# Altium PCB Sensors.PcbDoc
Units mil, origin at the board's own origin, x right, y up, seen from the top; angles counter-clockwise.
Board outline 1625 x 1755 mil, 2 copper layers (Top Layer, Bottom Layer); 50 components, 34 nets, 167 pads, 122 vias.
Unrouted connection lines stored in the file: 40.
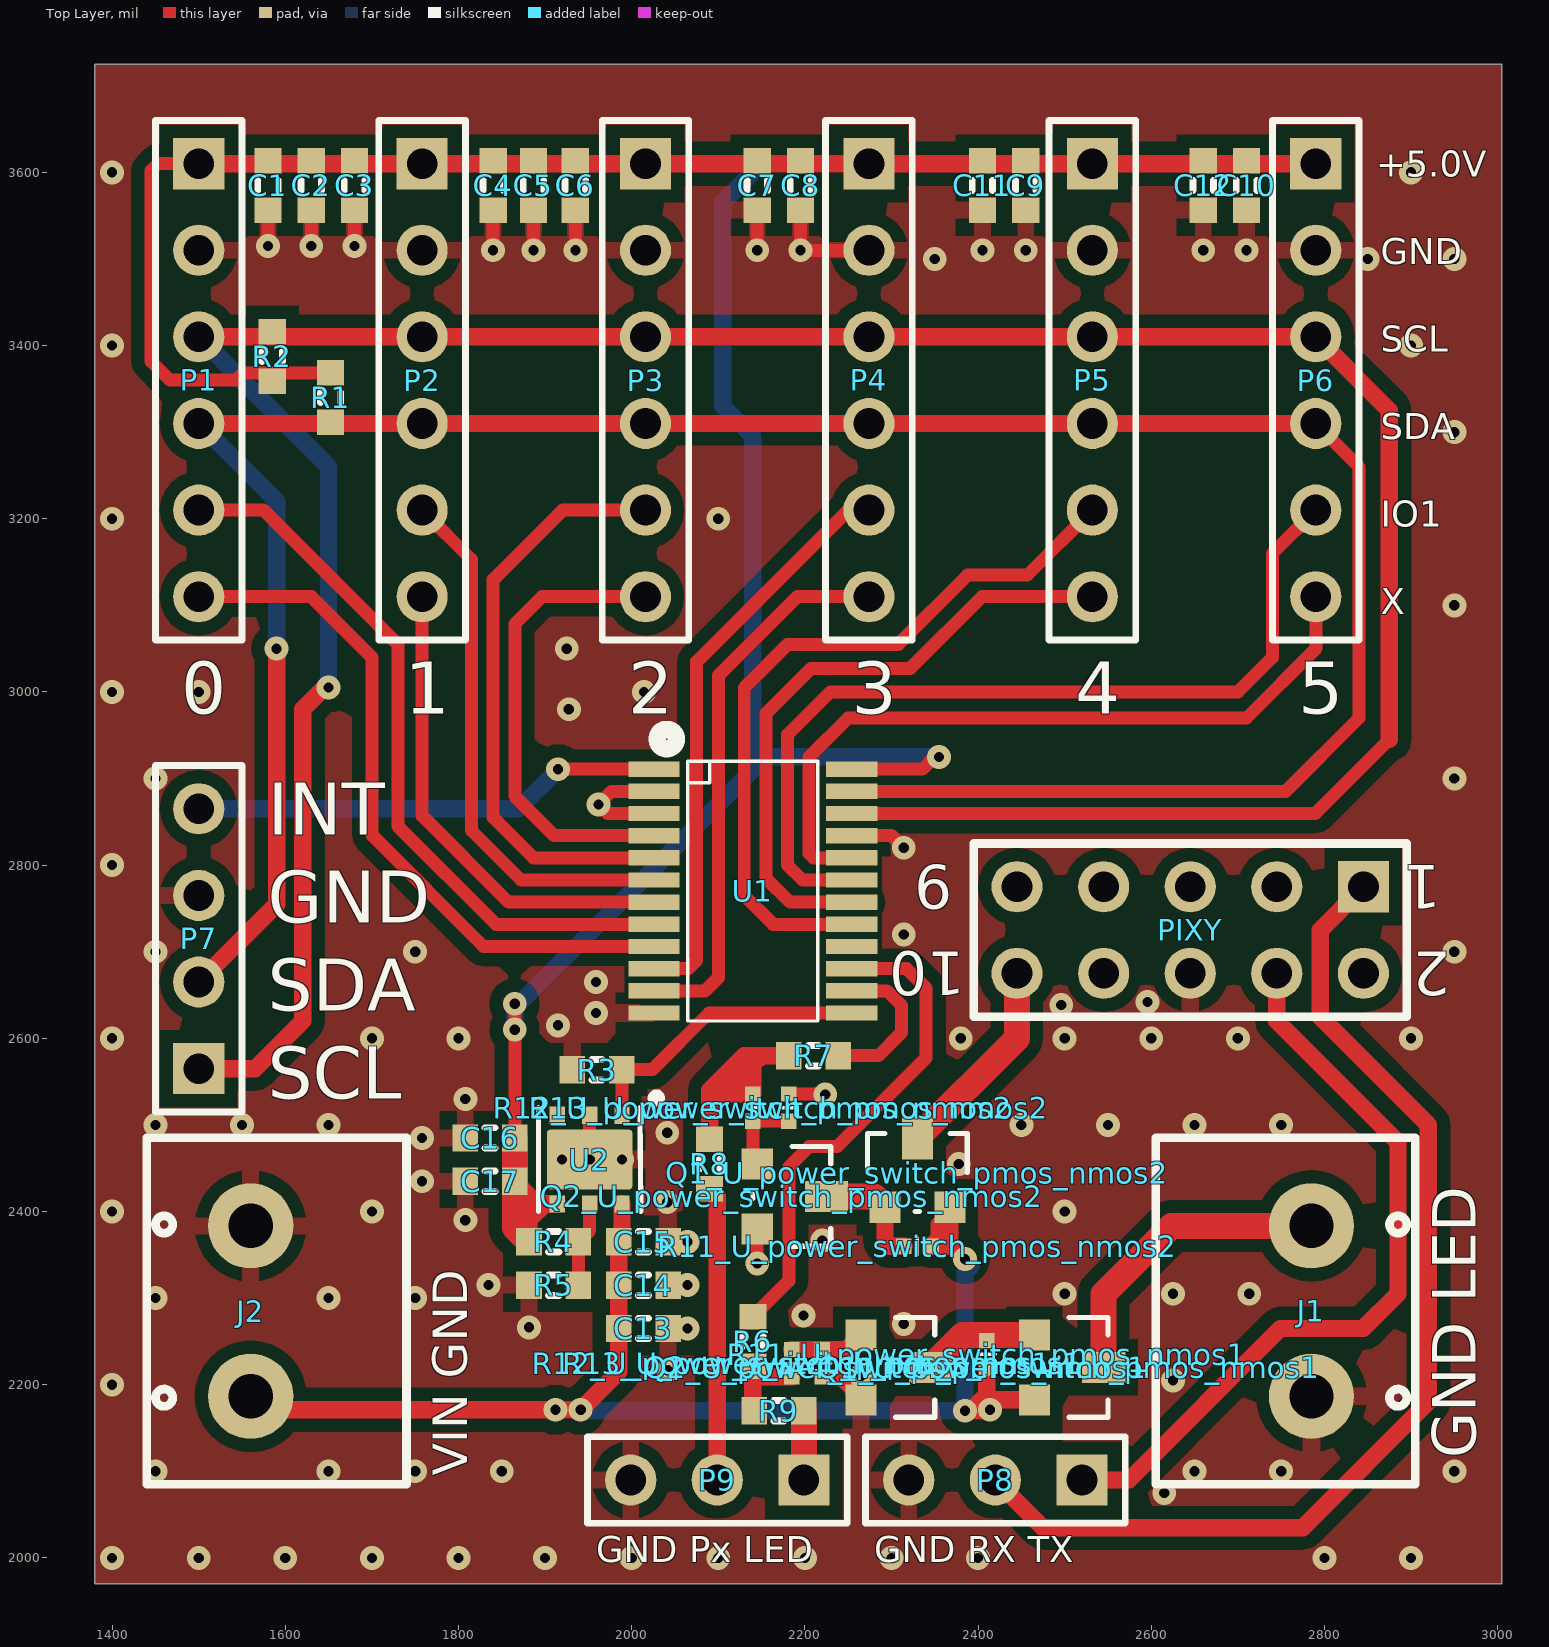
[diagram p0: Top Layer view]
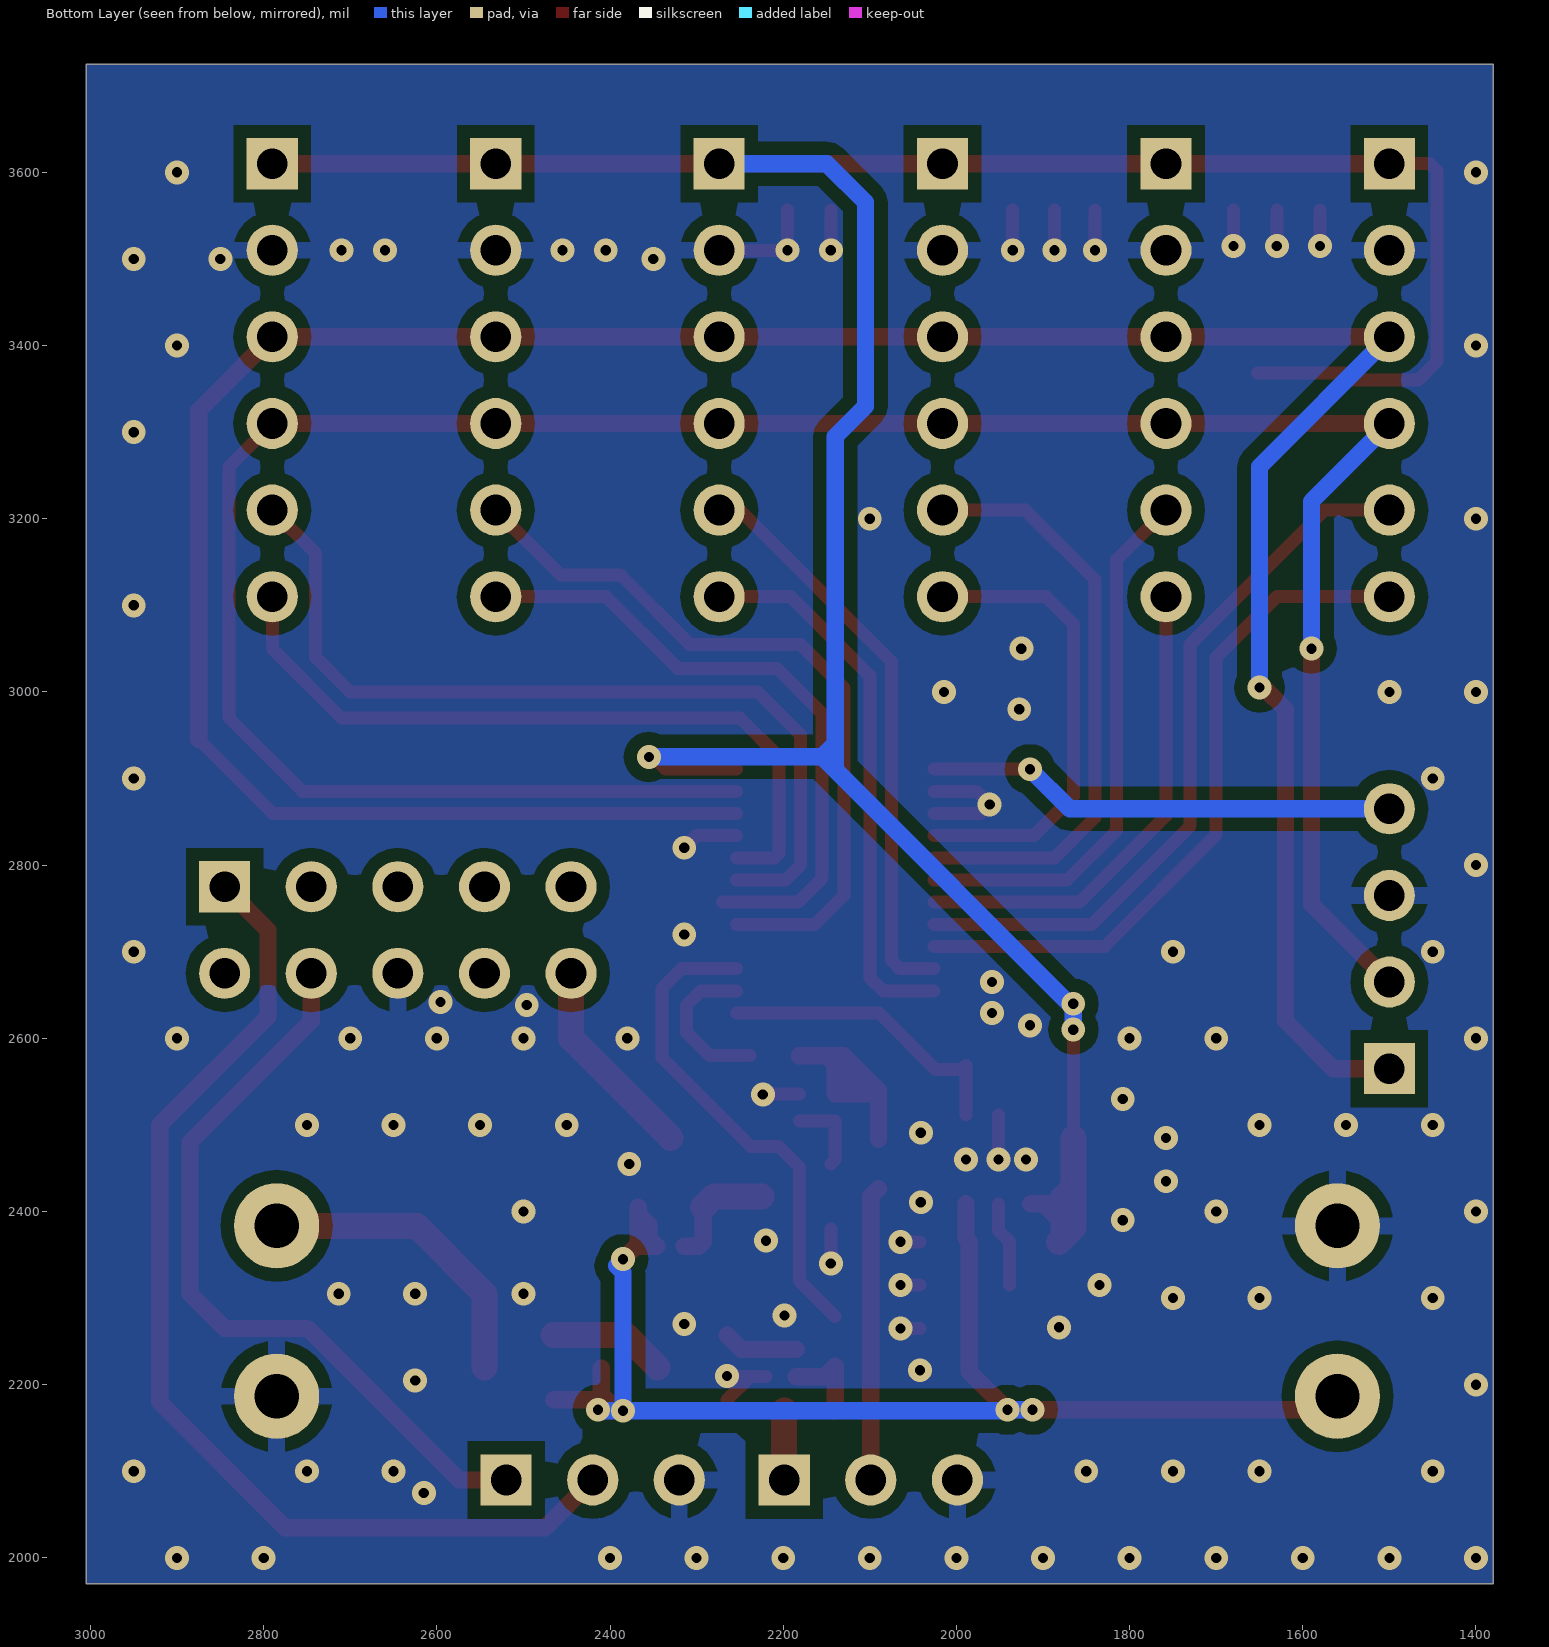
[diagram p1: Bottom Layer view, seen from below]

## Layer stack, top to bottom
Top Solder: solder mask 0.4, Solder Resist, Dk 3.5
Top Layer: signal copper 1.4
Dielectric 1: dielectric 12.6, FR-4, Dk 4.8
Bottom Layer: signal copper 1.4
Bottom Solder: solder mask 0.4, Solder Resist, Dk 3.5

## Board outline
1380,1970 1380,3725 3005,3725 3005,1970

## Design rules (kind name [scope] priority, off if disabled: settings)
Clearance U2 [InComponent('U2') OR InComponent('U1')] p1: gap=5 ignorepadtopadclearanceinfootprint=FALSE
Clearance [All] p2: gap=10 ignorepadtopadclearanceinfootprint=FALSE except(15: Arc-Poly Track-Poly SMDPad-Poly THPad-Poly Via-Poly Fill-Poly Poly-Poly)
MinimumSolderMaskSliver [All] p1: minsoldermaskwidth=5
PlaneConnect [All] p1: planeconnectstyle=Direct reliefexpansion=20 reliefentries=4 reliefconductorwidth=10 reliefairgap=10
PlaneConnect via [IsVia] p2: planeconnectstyle=Direct reliefexpansion=20 reliefentries=4 reliefconductorwidth=10 reliefairgap=10
PolygonConnect via_p [IsVia] p1: connectstyle=Direct reliefconductorwidth=10 reliefentries=4 polygonreliefangle="90 Angle" airgapwidth=10
PolygonConnect via_1 [All] p2: connectstyle=Relief reliefconductorwidth=20 reliefentries=4 polygonreliefangle="90 Angle" airgapwidth=15
RoutingVias [All] p1: holewidth=28 width=50 viastyle="Through Hole" minholewidth=11.81 minwidth=27.56 maxholewidth=118.11 maxwidth=196.85
SilkToSolderMaskClearance [IsPad] p1: minsilkscreentomaskgap=3 clearancetoexposedcopper=TRUE
SolderMaskExpansion [All] p1: expansion=4
Width [All] p1: maxlimit=50 minlimit=10 preferedwidth=10
27 further rules are at their usual default settings.

## Classes and differential pairs
channel class power_switch_pmos_nmos: U_power_switch_pmos_nmos1 U_power_switch_pmos_nmos2
component class U_power_switch_pmos_nmos2: Q1_U_power_switch_pmos_nmos2 Q2_U_power_switch_pmos_nmos2 R11_U_power_switch_pmos_nmos2 R12_U_power_switch_pmos_nmos2 R13_U_power_switch_pmos_nmos2
component class U_power_switch_pmos_nmos1: Q1_U_power_switch_pmos_nmos1 Q2_U_power_switch_pmos_nmos1 R11_U_power_switch_pmos_nmos1 R12_U_power_switch_pmos_nmos1 R13_U_power_switch_pmos_nmos1
component class Sensors: C1 C2 C3 C4 C5 C6 C7 C8 C9 C10 C11 C12 C13 C14 C15 C16 C17 J1 J2 P1 P2 P3 P4 P5 P6 P7 P8 P9 PIXY R1 R2 R3 R4 R5 R6 R7 R8 R9 U1 U2

## Components (designator, comment, footprint, x,y, rotation, side; value= is the part's Value field where it differs from the comment)
C1 "Ceramic X7R" C_0603_1608 1580,3585 r270 top value=1uF
C2 "Ceramic X7R" C_0603_1608 1630,3585 r270 top value=100nF
C3 "Ceramic X7R" C_0603_1608 1680,3585 r270 top value=1uF
C4 "Ceramic X7R" C_0603_1608 1840,3585 r270 top value=100nF
C5 "Ceramic X7R" C_0603_1608 1886.61,3585 r270 top value=1uF
C6 "Ceramic X7R" C_0603_1608 1935,3585 r270 top value=100nF
C7 "Ceramic X7R" C_0603_1608 2145,3585 r270 top value=1uF
C8 "Ceramic X7R" C_0603_1608 2195,3585 r270 top value=100nF
C9 "Ceramic X7R" C_0603_1608 2455,3585 r270 top value=100nF
C10 "Ceramic X7R" C_0603_1608 2710,3585 r270 top value=100nF
C11 "Ceramic X7R" C_0603_1608 2405,3585 r270 top value=1uF
C12 "Ceramic X7R" C_0603_1608 2660,3585 r270 top value=1uF
C13 "Ceramic X5R" C_0603_1608 2013.54,2265 r0 top value=10uF
C14 "Ceramic X5R" C_0603_1608 2013.54,2315 r0 top value=10uF
C15 "Ceramic X7R" C_0603_1608 2013.54,2365 r0 top value=100nF
C16 "Ceramic X5R" C_0603_1608 1836.46,2485 r180 top value=10uF
C17 "Ceramic X7R" C_0603_1608 1836.46,2435 r180 top value=100nF
J1 "ARK2" J_ARK2 2785,2285 r270 top value=DG301-5.0-02P-12-18A(H)
J2 "ARK2" J_ARK2 1560,2285 r90 top value=DG301-5.0-02P-12-18A(H)
P1 "Goldpin" P_HEADER_1x6_2.54 1500,3610 r270 top value=DS1021-1*6SF1-1
P2 "Goldpin" P_HEADER_1x6_2.54 1758,3610 r270 top value=DS1021-1*6SF1-1
P3 "Goldpin" P_HEADER_1x6_2.54 2016,3610 r270 top value=DS1021-1*6SF1-1
P4 "Goldpin" P_HEADER_1x6_2.54 2274,3610 r270 top value=DS1021-1*6SF1-1
P5 "Goldpin" P_HEADER_1x6_2.54 2532,3610 r270 top value=DS1021-1*6SF1-1
P6 "Goldpin" P_HEADER_1x6_2.54 2790,3610 r270 top value=DS1021-1*6SF1-1
P7 "Goldpin" P_HEADER_1x4_2.54 1500,2565 r90 top value=DS1021-1*4SF1-1
P8 "Goldpin" P_HEADER_1x3_2.54 2520,2090 r180 top value=DS1021-1*3SF1-1
P9 "Goldpin" P_HEADER_1x3_2.54 2198.86,2090 r180 top value=DS1021-1*3SF1-1
PIXY "Goldpin" P_HEADER_2x5_2.54 2845,2775 r180 top locked value=5-146253-5
Q1_U_power_switch_pmos_nmos1 "DMG2307L" SOT23_TO236_SC59 2505,2220 r270 top (schematic designator Q1)
Q1_U_power_switch_pmos_nmos2 "DMG2307L" SOT23_TO236_SC59 2330,2445 r0 top (schematic designator Q1)
Q2_U_power_switch_pmos_nmos1 "2N7002K-7" SOT23_TO236_SC59 2305,2220 r270 top (schematic designator Q2)
Q2_U_power_switch_pmos_nmos2 "2N7002K-7" SOT23_TO236_SC59 2185,2417.5 r270 top (schematic designator Q2)
R1 "Resistor" R_0603_1608 1652.33,3340 r90 top value=4.7k
R2 "Resistor" R_0603_1608 1585,3387.54 r270 top value=4.7k
R3 "Resistor" R_0603_1608 1960,2563.86 r0 top value=100k
R4 "Resistor" R_NC_0603_1608 1910,2365 r180 top value=NC
R5 "Resistor" R_NC_0603_1608 1910,2315 r0 top value=NC
R6 "Resistor" R_NC_0603_1608 2140,2250 r270 top value=NC
R7 "Resistor" R_NC_0603_1608 2210,2580 r180 top value=NC
R8 "Resistor" R_0603_1608 2090,2455 r90 top value=0R
R9 "Resistor" R_0603_1608 2170,2170 r180 top value=0R
R11_U_power_switch_pmos_nmos1 "Resistor" R_0402_1005 2410,2235 r90 top value=22k (schematic designator R11)
R11_U_power_switch_pmos_nmos2 "Resistor" R_0402_1005 2330,2360 r180 top value=22k (schematic designator R11)
R12_U_power_switch_pmos_nmos1 "Resistor" R_0402_1005 2185,2225 r90 top value=2.2k (schematic designator R12)
R12_U_power_switch_pmos_nmos2 "Resistor" R_0402_1005 2140,2520 r270 top value=2.2k (schematic designator R12)
R13_U_power_switch_pmos_nmos1 "Resistor" R_0402_1005 2220,2225 r90 top value=220k (schematic designator R13)
R13_U_power_switch_pmos_nmos2 "Resistor" R_0402_1005 2181.46,2520 r270 top value=220k (schematic designator R13)
U1 "5 Low-Voltage 16-Bit I2C and SMBus Low-Power I/O Expander with Interrupt Output and Configuration Registers" TSSOP24_8x8 2140,2770 r270 top locked value=TCA9535DBR
U2 "LD39050PUR" DFN6_3x3 1951.46,2460 r180 top

## Footprints (in the part's own frame and the unit in brackets; to place one, negate y for a bottom-side part, rotate by r counter-clockwise, add the part's x,y. Pads: shape width x height; smd on the part's side, far side on the other; paste and mask are expansions set on the pad)
C_0603_1608 [mm]
  rect 0.75x0.8 smd: 1(-0.725,0) 2(0.725,0)
  silkscreen extent -0.15,-0.3 0.15,0.3, body extent -0.85,-0.45 0.85,0.45, height 0.89
DFN6_3x3 [mm]
  rect 0.45x0.5 smd: 1(-0.95,-1.3) 2(0,-1.3) 3(0.95,-1.3) 4(0.95,1.3) 5(0,1.3) 6(-0.95,1.3)
  rrect10% 2.5x1.75 smd: EP1(0,0)
  silkscreen extent -2.08,-1.93 1.5,1.52, body extent -1.5,-1.55 1.5,1.55, height 0.75
J_ARK2 [mm]
  round 2.5 hole 1.3: 1(-2.5,0) 2(2.5,0)
  silkscreen extent -5.08,-4.57 5.08,3.05, body extent -5,-4.6 5.6,3, height 10.05
P_HEADER_1x3_2.54 [mm] "Connector; Header; 3 Position, Male"
  rect 1.5x1.5 hole 0.9: 1(0,0)
  round 1.5 hole 0.9: 2(2.54,0) 3(5.08,0)
  silkscreen extent -1.27,-1.27 6.35,1.27, body extent -1.17,-1.25 6.45,1.25, height 8.2
P_HEADER_1x4_2.54 [mm] "Connector; Header; 4 Position; Male"
  rect 1.5x1.5 hole 0.9: 1(0,0)
  round 1.5 hole 0.9: 2(2.54,0) 3(5.08,0) 4(7.62,0)
  silkscreen extent -1.27,-1.27 8.89,1.27, body extent -1.17,-1.25 8.99,1.25, height 8.2
P_HEADER_1x6_2.54 [mm] "Connector; Header; 6 Position, Male"
  rect 1.5x1.5 hole 0.9: 1(0,0)
  round 1.5 hole 0.9: 2(2.54,0) 3(5.08,0) 4(7.62,0) 5(10.16,0) 6(12.7,0)
  silkscreen extent -1.27,-1.27 13.97,1.27, body extent -1.17,-1.25 14.07,1.25, height 8.2
P_HEADER_2x5_2.54 [mm] "Connector; Header; 4x2 Position; Male"
  rect 1.5x1.5 hole 0.9: 1(0,0)
  round 1.5 hole 0.9: 2(0,2.54) 3(2.54,0) 4(2.54,2.54) 5(5.08,0) 6(5.08,2.54) 7(7.62,0) 8(7.62,2.54) 9(10.16,0) 10(10.16,2.54)
  silkscreen extent -1.27,-1.27 11.43,3.81, body extent -1.27,-1.24 11.43,3.79, height 8.54
R_0402_1005 [mm]
  rect 0.45x0.45 smd: 1(-0.4,0) 2(0.4,0)
  silkscreen extent 0,-0.25 0,0.25, body extent -0.52,-0.3 0.52,0.3, height 0.34
R_0603_1608 [mm]
  rect 0.75x0.8 smd: 1(-0.725,0) 2(0.725,0)
  silkscreen extent -0.15,-0.3 0.15,0.3, body extent -0.87,-0.47 0.88,0.48, height 0.54
R_NC_0603_1608 [mm]
  rect 0.75x0.8 smd: 1(-0.725,0) 2(0.725,0)
  silkscreen extent -0.15,-0.3 0.15,0.3, body extent -0.87,-0.47 0.88,0.48, height 0.54
SOT23_TO236_SC59 [mil]
  rect 36x36 smd: 1(-37.5,-40) 2(37.5,-40)
  rect 36x50 smd: 3(0,40)
  silkscreen extent -57,-45 58,45, body extent -57,-55 57,55, height 51
TSSOP24_8x8 [mm]
  rect 0.45x1.5 smd: 1(-3.575,-2.9) 2(-2.925,-2.9) 3(-2.275,-2.9) 4(-1.625,-2.9) 5(-0.975,-2.9) 6(-0.325,-2.9) 7(0.325,-2.9) 8(0.975,-2.9) 9(1.625,-2.9) 10(2.275,-2.9) 11(2.925,-2.9) 12(3.575,-2.9) 13(3.575,2.9) 14(2.925,2.9) 15(2.275,2.9) 16(1.625,2.9) 17(0.975,2.9) 18(0.325,2.9) 19(-0.325,2.9) 20(-0.975,2.9) 21(-1.625,2.9) 22(-2.275,2.9) 23(-2.925,2.9) 24(-3.575,2.9)
  silkscreen extent -4.74,-2.81 3.81,1.91, body extent -3.9,-3.2 3.99,3.2, height 1.15

## Part data
C1 C3 C5 C7 C11 C12: library part C_1uF_25V_X7R_0603_10, "Capacitor", Dielectric=X7R, Manufacturer=Samsung, Manufacturer Part Number=CL10B105KA8NNNC, Tolerance (%)=10, Voltage=25V, HelpURL=http://www.tme.eu/pl/Document/4a42202b32dab16128fe107dd69598cc/samsung-chip-cap.pdf, Part Number=C_1uF_25V_X7R_0603_10, SCH_Footprint=0603, Supplier 1=TME, Supplier 2="RS Components", Supplier 3=Farnell, Supplier 4=Mouser, Supplier 5=Digi-Key, Supplier Part Number 1=CL10B105KA8NNNC
C2 C4 C6 C8 C9 C10 C15 C17: library part C_100nF_50V_X7R_0603_5, "Capacitor", Dielectric=X7R, Manufacturer=Samsung, Manufacturer Part Number=CL10B104JB8NNNC, Tolerance (%)=5, Voltage=50V, HelpURL=http://www.tme.eu/pl/Document/4a42202b32dab16128fe107dd69598cc/samsung-chip-cap.pdf, Part Number=C_100nF_50V_X7R_0603_5, SCH_Footprint=0603, Supplier 1=TME, Supplier 2="RS Components", Supplier 3=Farnell, Supplier 4=Mouser, Supplier 5=Digi-Key, Supplier Part Number 1=CL10B104JB8NNNC
C13 C14 C16: library part C_10uF_16V_X5R_0603_20, "Capacitor", Dielectric=X5R, Manufacturer="Samsung Electro-Mechanics", Manufacturer Part Number=CL10A106MO8NQNC, Tolerance (%)=20, Voltage=16V, HelpURL=http://www.tme.eu/pl/Document/4a42202b32dab16128fe107dd69598cc/samsung-chip-cap.pdf, Part Number=C_10uF_16V_X5R_0603_20, SCH_Footprint=0603, Supplier 1=TME, Supplier 2="RS Components", Supplier 3=Farnell, Supplier 4=Mouser, Supplier 5=Digi-Key, Supplier Part Number 1=CL10A106MO8NQNC
J1 J2: library part J_TB-5.0-P-2P, "ARK Screw terminal, 2-Pin", Manufacturer="DEGSON ELECTRONICS", Manufacturer Part Number=DG301-5.0-02P-12-18A(H), Supplier Part Number 1=DG301-5.0-2/6B, Component Type=Standard, HelpURL=https://datasheet.octopart.com/DG301-5.0-03P-12-18A%28H%29-Degson-datasheet-17801202.pdf, Part Number=J_TB-5.0-P-2P, SCH_Footprint=ARK2, Supplier 1=TME, Supplier 2="RS Components", Supplier 3=Farnell, Supplier 4=Mouser, Supplier 5=Digi-Key
P1 P2 P3 P4 P5 P6: library part P_HEADER_1x6_2.54, "Header, 6-Pin", Manufacturer=Connfly, Manufacturer Part Number=DS1021-1*6SF1-1, Supplier Part Number 1=ZL201-06G, Component Type=Standard, HelpURL=http://www.tme.eu/en/Document/cc301e58a5da78cb543a94b5a5b7f06a/DS1021.pdf, Part Number=P_HEADER_1x6_2.54, SCH_Footprint="1x6 2.54mm", Supplier 1=TME, Supplier 2="RS Components", Supplier 3=Farnell, Supplier 4=Mouser, Supplier 5=Digi-Key
P7: library part P_HEADER_1x4_2.54, "Header, 4-Pin", Manufacturer=Connfly, Manufacturer Part Number=DS1021-1*4SF1-1, Supplier Part Number 1=ZL201-04G, Component Type=Standard, HelpURL=http://datasheet.octopart.com/DS1021-1%2A4SF1-1-Connfly-datasheet-65537859.pdf, Part Number=P_HEADER_1x4_2.54, SCH_Footprint="1x4 2.54mm", Supplier 1=TME, Supplier 2="RS Components", Supplier 3=Farnell, Supplier 4=Mouser, Supplier 5=Digi-Key
P8 P9: library part P_HEADER_1x3_2.54, "Header, 3-Pin", Manufacturer=Connfly, Manufacturer Part Number=DS1021-1*3SF1-1, Supplier Part Number 1=ZL201-03G, Component Type=Standard, HelpURL=http://www.tme.eu/en/Document/cc301e58a5da78cb543a94b5a5b7f06a/DS1021.pdf, Part Number=P_HEADER_1x3_2.54, SCH_Footprint="1x3 2.54mm", Supplier 1=TME, Supplier 2="RS Components", Supplier 3=Farnell, Supplier 4=Mouser, Supplier 5=Digi-Key
PIXY: library part P_HEADER_2x5_2.54, "Header, 10-Pin, Dual row", Manufacturer="TE Connectivity", Manufacturer Part Number=5-146253-5, Component Type=Standard, HelpURL=https://sigma.octopart.com/11631052/technical_drawing/TE-Connectivity-5-146253-5.pdf, Part Number=P_HEADER_2x5_2.54, SCH_Footprint="2x5 2.54mm", Supplier 1=TME, Supplier 2="RS Components", Supplier 3=Farnell, Supplier 4=Mouser, Supplier 5=Digi-Key, Supplier Part Number 2=782-9205, Supplier Part Number 3=2311131, Supplier Part Number 4=571-5-146253-5, Supplier Part Number 5=A121461-ND
Q1_U_power_switch_pmos_nmos1 Q1_U_power_switch_pmos_nmos2: library part QP_DMG2307L, Current=3A, Manufacturer="Diodes Inc", Supplier Part Number 1=DMG2307L-7, Voltage=30, HelpURL=https://www.diodes.com/assets/Datasheets/DMG2307L.pdf, Manufacturer Part Number=DMG2307L, Part Number=QP_DMG2307L, SCH_Footprint=SOT23, Supplier 1=TME, Supplier 2="RS Components", Supplier 3=Farnell, Supplier 4=Mouser, Supplier 5=Digi-Key, Supplier Part Number 2=8222539, Supplier Part Number 3=3127316, Supplier Part Number 4=621-DMG2307L-7, Supplier Part Number 5=DMG2307L-7DICT-ND, Type=P-MOS
Q2_U_power_switch_pmos_nmos1 Q2_U_power_switch_pmos_nmos2: library part QN_2N7002K-7_60V_350mA, Current=0A8, Manufacturer="DIODES inc", Voltage=60V, HelpURL=http://datasheet.octopart.com/2N7002K-7-Diodes-Inc.-datasheet-12515815.pdf, Manufacturer Part Number=2N7002K-7, Part Number=QN_2N7002K-7_60V_350mA, SCH_Footprint=SOT23, Supplier 1=TME, Supplier 2="RS Components", Supplier 3=Farnell, Supplier 4=Mouser, Supplier 5=Digi-Key, Supplier Part Number 2=7703383, Supplier Part Number 3=1713825, Supplier Part Number 4=621-2N7002K-7, Supplier Part Number 5=2N7002K-7DICT-ND, Type=N-MOS
R1 R2: library part R_4.7k_0603_1, Manufacturer=Yageo, Manufacturer Part Number=RC0603FR-074K7L, Power=100mW, Supplier Part Number 1=RC0603FR-074K7, Tolerance=1%, Voltage=75V, HelpURL=http://www.farnell.com/datasheets/2167052.pdf?_ga=2.156163131.1690599162.1548417389-1379097396.1542296996&_gac=1.18389067.1547230258.Cj0KCQiAmuHhBRD0ARIsAFWyPwhX8HcvXnM3tA0ZBodZLzDIjH2ZxLpjT5LWo9bad_HPRbU8LfPq44UaAhEwEALw_wcB, Part Number=R_4.7k_0603_1, SCH_Footprint=0603, Supplier 1=TME, Supplier 2="RS Components", Supplier 3=Farnell, Supplier 4=Mouser, Supplier 5=Digi-Key, Supplier Part Number 3=9238565, Supplier Part Number 4=603-RC0603FR-074K7L, Supplier Part Number 5=311-4.70KHRCT-ND
R3: library part R_100k_0603_1, Manufacturer=Royalohm, Manufacturer Part Number=0603SAF1003T5E, Power=100mW, Supplier Part Number 1=SMD0603-100K-1%, Tolerance=1%, Voltage=50V, HelpURL=http://www.tme.eu/pl/Document/b315665a56acbc42df513c99b390ad98/ROYALOHM-THICKFILM.pdf, Part Number=R_100k_0603_1, SCH_Footprint=0603, Supplier 1=TME, Supplier 2="RS Components", Supplier 3=Farnell, Supplier 4=Mouser, Supplier 5=Digi-Key, Supplier Part Number 4=667-ERJ-3EKF1003V, Supplier Part Number 5=P100KHCT-ND
R4 R5 R6 R7: library part R_GENERIC_0603, Part Number=R_GENERIC_0603, SCH_Footprint=0603, Supplier 1=TME, Supplier 2="RS Components", Supplier 3=Farnell, Supplier 4=Mouser, Supplier 5=Digi-Key
R8 R9: library part R_0R_0603_5, Manufacturer=Samsung, Manufacturer Part Number=RC1608J000CS, Power=100mW, Tolerance=5%, Voltage=50V, HelpURL=http://www.samsungsem.com/kr/support/product-search/chip-resistor/RC1608J000CS.jsp, Part Number=R_0R_0603_5, SCH_Footprint=0603, Supplier 1=TME, Supplier 2="RS Components", Supplier 3=Farnell, Supplier 4=Mouser, Supplier 5=Digi-Key, Supplier Part Number 5=1276-3510-1-ND
R11_U_power_switch_pmos_nmos1 R11_U_power_switch_pmos_nmos2: library part R_22k_0402_1, Manufacturer=Panasonic, Manufacturer Part Number=ERA-2AEB223X, Power=63mW, Tolerance=1%, Voltage=50V, HelpURL=http://www.mouser.com/ds/2/315/AOA0000C237-1100991.pdf, Part Number=R_22k_0402_1, SCH_Footprint=0402, Supplier 1=TME, Supplier 2="RS Components", Supplier 3=Farnell, Supplier 4=Mouser, Supplier 5=Digi-Key, Supplier Part Number 2=566557, Supplier Part Number 3=1577719, Supplier Part Number 4=667-ERA-2AEB223X, Supplier Part Number 5=P22KDCCT-ND
R12_U_power_switch_pmos_nmos1 R12_U_power_switch_pmos_nmos2: library part R_2.2k_0402_1, Manufacturer=Panasonic, Manufacturer Part Number=ERJ-2RKF2201X, Power=100mW, Tolerance=1%, Voltage=50V, HelpURL=https://datasheet.octopart.com/ERJ-2RKF2201X-Panasonic-datasheet-13266541.pdf, Part Number=R_2.2k_0402_1, SCH_Footprint=0402, Supplier 1=TME, Supplier 2="RS Components", Supplier 3=Farnell, Supplier 4=Mouser, Supplier 5=Digi-Key, Supplier Part Number 2=7325384, Supplier Part Number 3=2397219, Supplier Part Number 4=ERJ-2RKF2201X, Supplier Part Number 5=P2.20KLCT-ND
R13_U_power_switch_pmos_nmos1 R13_U_power_switch_pmos_nmos2: library part R_220k_0402_1, Manufacturer=Vishay, Manufacturer Part Number=CRCW0402220KFKED, Power=63mW, Tolerance=1%, Voltage=50V, HelpURL=https://www.farnell.com/datasheets/2310790.pdf, Part Number=R_220k_0402_1, SCH_Footprint=0402, Supplier 1=TME, Supplier 2="RS Components", Supplier 3=Farnell, Supplier 4=Mouser, Supplier 5=Digi-Key, Supplier Part Number 2=678-8967, Supplier Part Number 3=2140958, Supplier Part Number 4=71-CRCW0402-220K-E3, Supplier Part Number 5=541-220KLCT-ND
U1: library part U_TCA9535DBR, "Low-Voltage 16-Bit I2C and SMBus Low-Power I/O Expander with Interrupt Output and Configuration Registers", Manufacturer="Texas Instruments", Manufacturer Part Number=TCA9535DBR, HelpURL=http://www.ti.com/lit/ds/symlink/tca9535.pdf, Part Number=U_TCA9535DBR, SCH_Footprint=TSSOP24, Supplier 1=TME, Supplier 2="RS Components", Supplier 3=Farnell, Supplier 4=Mouser, Supplier 5=Digi-Key, Supplier Part Number 3=2627594, Supplier Part Number 4=595-TCA9535DBR, Supplier Part Number 5=296-44625-1-ND
U2: library part VL_LD39050PUR, Current=500mA, Manufacturer=STMicroelectronics, Voltage=ADJ, HelpURL=https://pl.mouser.com/datasheet/2/389/ld39050-974080.pdf, Manufacturer Part Number=LD39050PUR, Part Number=VL_LD39050PUR, SCH_Footprint=DFN6, Supplier 1=TME, Supplier 2="RS Components", Supplier 3=Farnell, Supplier 4=Mouser, Supplier 5=Digi-Key, Supplier Part Number 1=LD39050PUR, Supplier Part Number 2=8805317, Supplier Part Number 3=2762704, Supplier Part Number 4=511-LD39050PUR, Supplier Part Number 5=497-8717-1-ND

## Via types
v1: diameter 27.56, hole 11.81, Top Layer to Bottom Layer, tented both sides, 122 vias

## Nets (pads, with @x,y where several pads share a name; then routed paths per layer and width w, separated by ;. In a path a pad name is that pad's centre, name@x,y a point inside that pad or via, vN(x,y) a via of type N, cw(c..) or ccw(c..) an arc to the next point about the centre after c; other vN are vias at no path point)
+5.0V: C1.1 C2.1 C3.1 C4.1 C5.1 C6.1 C7.1 C8.1 C9.1 C10.1 C11.1 C12.1 C16.1 C17.1 P1.1 P2.1 P3.1 P4.1 P5.1 P6.1 R1.2 R2.2 R4.2 U1.24 U2.4 | length 3888.5
  Top Layer w15: P1.1@1515,3610 P1.1 1453.08,3610 1445,3601.92 1445,3381.8 1466.8,3360 1543.38,3360 1551.92,3368.54 R1.2 ; C16.1 1870,2490 1865,2495 v1(1865,2610) v1(1865,2640) ; U1.24 2335.75,2910.75 2350,2925 v1(2355,2925)
  Top Layer w20: P1.1@1515,3610 P2.1 P3.1 P4.1 P5.1 P6.1 ; 1865,2405 1868.82,2408.82 1881.46,2408.82 ; C17.1 1881.46,2418.54 1881.46,2408.82 ; R4.2@1871.46,2375 1871.46,2380.28 1881.46,2390.28 ; R4.2 1881.46,2390.28 ; U2.4 1900,2408.82 ; 1881.46,2390.28 1900,2408.82 ; 1881.46,2390.28 1881.46,2408.82 ; 1881.46,2408.82 1900,2408.82
  Top Layer w30: C16.1 C17.1 1865,2405 1865,2381.46 1871.46,2375 R4.2
  Bottom Layer w20: v1(1865,2610) v1@1865,2635 ; v1(1865,2640) v1@1865,2635 ; 2140,2945 2140,2940 ; P4.1 2149.53,3610 2105,3565.47 2105,3330 2140,3295 2140,2940 ; v1(2355,2925) 2155,2925 ; v1@1865,2635 2140,2910 ; 2140,2910 2147.5,2917.5 ; 2140,2910 2140,2925 ; 2140,2925 2140,2940 ; 2140,2925 2147.5,2917.5 ; 2140,2940 2155,2925 ; 2147.5,2917.5 2155,2925
GND: C1.2 C2.2 C3.2 C4.2 C5.2 C6.2 C7.2 C8.2 C9.2 C10.2 C11.2 C12.2 C13.2 C14.2 C15.2 C16.2 C17.2 J1.2 J2.2 P1.2 P2.2 P3.2 P4.2 P5.2 P6.2 P7.3 P8.3 P9.3 PIXY.6 Q2_U_power_switch_pmos_nmos1.2 Q2_U_power_switch_pmos_nmos2.2 R3.1 R5.1 R13_U_power_switch_pmos_nmos1.1 R13_U_power_switch_pmos_nmos2.1 U1.2 U1.3 U1.12 U1.21 U2.2 U2.EP1 | length 924.5
  Top Layer w15: v1(1580,3515) C1.2 ; v1(1630,3515) C2.2 ; v1(1680,3515) C3.2 ; v1(1840,3510) C4.2 ; v1(1886.61,3510) C5.2 ; v1(1935,3510) C6.2 ; v1(1951.46,2460) U2.2 ; U1.3 1972.06,2859.57 v1(1961.63,2870) 1976.79,2885.16 U1.2 ; C13.2 v1(2064.51,2265) ; C14.2 v1(2064.51,2315) ; C15.2 v1(2064.51,2365) ; v1(2145,2340) Q2_U_power_switch_pmos_nmos2.2 ; v1(2145,3510) C7.2 ; R13_U_power_switch_pmos_nmos2.1 2222.76,2535.75 v1(2223.51,2535) ; C8.2 v1(2195,3510) P4.2 ; R13_U_power_switch_pmos_nmos1.1 2238.25,2209.25 ; U1.21 2300.28,2833.98 v1(2314.25,2820) ; Q2_U_power_switch_pmos_nmos1.2 2238.25,2209.25 ; v1(2265,2210) 2264.25,2209.25 2238.25,2209.25
  other v1: 1400,2000 1500,2000 1600,2000 1700,2000 1800,2000 1900,2000 2000,2000 2100,2000 2200,2000 2300,2000 2400,2000 2800,2000 2900,2000 2615,2075 1450,2100 1650,2100 1750,2100 1850,2100 2650,2100 2750,2100 2950,2100 1400,2200 2625,2205 2042.09,2216.73 1881.46,2266.24 2314.25,2270 2198.54,2280 1450,2300 1650,2300 1750,2300 2500,2305 2625,2305 2713.24,2305 1834.74,2315 2220,2366.33 1807.91,2390 1400,2400 1700,2400 2500,2400 2041.08,2410.68 1758,2435 2377.77,2455 1919.59,2460 1988.86,2460 1758,2485 2041.08,2491 1450,2500 1550,2500 1650,2500 2450,2500 2550,2500 2650,2500 2750,2500 1807.91,2530 1400,2600 1700,2600 1800,2600 2380,2600 2500,2600 2600,2600 2700,2600 2900,2600 1915,2615 1958.76,2629.25 2496.12,2638.62 2595.79,2642.09 1958.76,2665.14 1450,2700 1750,2700 2950,2700 2314.25,2720 1400,2800 1450,2900 2950,2900 1927.44,2980 1400,3000 1500,3000 2014.35,3000 1925,3050 2950,3100 1400,3200 2100,3200 2950,3300 1400,3400 2900,3400 2350,3500 2850,3500 2950,3500 2405,3510 2455,3510 2660,3510 2710,3510 1400,3600 2900,3600
IO1_0: P1.5 U1.8 | length 847
  Top Layer w15: P1.5 1575,3210 1730,3055 1730,2845 1843.39,2731.61 U1.8
IO1_1: P2.5 U1.6 | length 628.1
  Top Layer w15: P2.5 1815,3153 1815,2840 1872.2,2782.8 U1.6
IO1_2: P3.5 U1.5 | length 689.1
  Top Layer w15: P3.5 1920.35,3210 1840,3129.65 1840,2855 1886.61,2808.39 U1.5
IO1_3: P4.5 U1.10 | length 669.6
  Top Layer w15: U1.10 2065.43,2680.43 2075,2690 2075,3035 2250,3210 P4.5
IO1_4: P5.5 U1.17 | length 864.8
  Top Layer w15: U1.17 2163.39,2731.61 2130,2765 2130,3004.83 2180.17,3055 2307.94,3055 2387.94,3135 2457,3135 P5.5
IO1_5: P6.5 U1.19 | length 1019.6
  Top Layer w15: U1.19 2197.2,2782.8 2180,2800 2180,2950.6 2229.4,3000 2700,3000 2740,3040 2740,3160 P6.5
NetJ1_1: J1.1 Q1_U_power_switch_pmos_nmos1.3 | length 357.5
  Top Layer w30: Q1_U_power_switch_pmos_nmos1.3 2545,2305 2623.43,2383.43 J1.1
NetP7_4: P7.4 U1.1 | length 544.8
  Top Layer w15: v1(1915,2910.75) U1.1
  Bottom Layer w20: P7.4 1869.25,2865 v1(1915,2910.75)
NetP9_1: P9.1 R9.1 | length 80.1
  Top Layer w30: R9.1 2198.86,2169.69 P9.1
NetP9_2: P9.2 R8.1 | length 340.1
  Top Layer w20: R8.1 2098.86,2417.6 P9.2
NetPIXY_10: PIXY.10 Q1_U_power_switch_pmos_nmos2.3 | length 237.6
  Top Layer w30: Q1_U_power_switch_pmos_nmos2.3 2445,2600 PIXY.10
NetQ1_U_power_switch_pmos_nmos1_1: Q1_U_power_switch_pmos_nmos1.1 Q2_U_power_switch_pmos_nmos1.3 R11_U_power_switch_pmos_nmos1.2 | length 135.5
  Top Layer w30: Q2_U_power_switch_pmos_nmos1.3 2382.5,2257.5 Q1_U_power_switch_pmos_nmos1.1
NetQ1_U_power_switch_pmos_nmos2_1: Q1_U_power_switch_pmos_nmos2.1 Q2_U_power_switch_pmos_nmos2.3 R11_U_power_switch_pmos_nmos2.2 | length 136.5
  Top Layer w20: Q1_U_power_switch_pmos_nmos2.1 2292.5,2365 2297.5,2360 R11_U_power_switch_pmos_nmos2.2
  Top Layer w30: Q2_U_power_switch_pmos_nmos2.3 2280,2417.5 Q1_U_power_switch_pmos_nmos2.1
NetQ2_U_power_switch_pmos_nmos1_1: Q2_U_power_switch_pmos_nmos1.1 R12_U_power_switch_pmos_nmos1.2 R13_U_power_switch_pmos_nmos1.2 | length 86.9
  Top Layer w20: R12_U_power_switch_pmos_nmos1.2 R13_U_power_switch_pmos_nmos1.2 2248.25,2240.75 Q2_U_power_switch_pmos_nmos1.1
NetQ2_U_power_switch_pmos_nmos2_1: Q2_U_power_switch_pmos_nmos2.1 R12_U_power_switch_pmos_nmos2.2 R13_U_power_switch_pmos_nmos2.2 | length 92.8
  Top Layer w15: Q2_U_power_switch_pmos_nmos2.1 2140,2460 R12_U_power_switch_pmos_nmos2.2 R13_U_power_switch_pmos_nmos2.2
NetR3_2: R3.2 U1.13 U2.1 | length 350.4
  Top Layer w15: R3.2 R3.2@1988.86,2563.86 ; U2.1 R3.2@1988.86,2563.86 ; R3.2@1988.86,2568.86 R3.2@1988.86,2563.86 ; U1.13 2089.25,2629.25 2023.86,2563.86 R3.2@1988.86,2563.86
NetR4_1: R4.1 R5.2 U2.5 | length 99.2
  Top Layer w15: R5.2 R4.1 1951.46,2377.91 U2.5
NetR6_1: R6.1 U1.15 | length 576.4
  Top Layer w15: R6.1 2181.46,2320 2181.46,2451.46 2205,2475 2237.5,2475 2340,2577.5 2340,2657.83 2317.4,2680.43 U1.15
NetR6_2: R6.2 R9.2 R12_U_power_switch_pmos_nmos1.1 | length 102.1
  Top Layer w20: R9.2 2140,2171.46 R6.2 2152.2,2209.25 R12_U_power_switch_pmos_nmos1.1
NetR7_1: R7.1 U1.14 | length 180.1
  Top Layer w15: R7.1 2285,2580 2311.83,2606.83 2311.83,2637.82 2294.8,2654.84 U1.14
NetR7_2: R7.2 R8.2 R12_U_power_switch_pmos_nmos2.1 | length 371.1
  Top Layer w20: R8.2 2090,2540 ; R7.2 2150,2580 ; 2090,2540 2110,2560 ; 2090,2540 2094.25,2535.75 2125,2535.75 ; 2110,2550.75 2114.25,2555 2130,2555 ; 2110,2550.75 2110,2560 ; 2110,2550.75 2125,2535.75 ; 2110,2560 2130,2580 ; 2125,2535.75 2130,2535.75 ; 2130,2535.75 R12_U_power_switch_pmos_nmos2.1 2140,2555 ; 2130,2535.75 2130,2555 ; 2130,2555 2140,2555 ; 2130,2555 2130,2580 ; 2130,2580 2150,2580 ; 2140,2555 2140,2570 2150,2580
RX: P8.2 PIXY.1 | length 1250.3
  Top Layer w20: P8.2 2475,2035 2775,2035 2920,2180 2920,2500 2795,2625 2795,2725 PIXY.1
SCL: P1.3 P2.3 P3.3 P4.3 P5.3 P6.3 P7.1 R2.1 U1.22 | length 3456.7
  Top Layer w15: U1.22 2789.57,2859.57 2875,2945
  Top Layer w20: P7.1 1565,2565 1620,2620 1620,2980 1645,3005 v1(1650,3005) ; P1.3 1590,3410 P2.3 P3.3 P4.3 P5.3 P6.3 2875,3325 2875,2945
  Bottom Layer w20: P1.3 1650,3260 v1(1650,3005)
SDA: P1.4 P2.4 P3.4 P4.4 P5.4 P6.4 P7.2 R1.1 U1.23 | length 2991.2
  Top Layer w15: U1.23 2755.16,2885.16 2840,2970 2840,3260 P6.4
  Top Layer w20: P7.2 1590,2755 v1(1590,3050) ; P1.4 1590,3310 P2.4 P3.4 P4.4 P5.4 P6.4
  Bottom Layer w20: P1.4 1590,3220 v1(1590,3050)
TX: P8.1 PIXY.4 | length 882
  Top Layer w20: P8.1 2574.25,2090 2749.25,2265 2845,2265 2885,2305 2885,2480 2745,2620 PIXY.4
VIN: C13.1 C14.1 C15.1 J2.1 Q1_U_power_switch_pmos_nmos1.2 Q1_U_power_switch_pmos_nmos2.2 R11_U_power_switch_pmos_nmos1.1 R11_U_power_switch_pmos_nmos2.1 U2.6 | length 1626.8
  Top Layer w20: J2.1@1560,2171.1 v1(1912.08,2171.1) v1(1941.1,2171.1) 1985,2215 C13.1 C14.1 C15.1 1988.86,2368.86 U2.6 ; Q1_U_power_switch_pmos_nmos2.2 Q1_U_power_switch_pmos_nmos2.2@2367.5,2397.5 ; v1(2385,2345) 2370,2360 ; R11_U_power_switch_pmos_nmos1.1 2410,2188.59 2391.41,2170 v1(2385,2170) 2408.9,2170 2410,2171.1 2421.4,2182.5 Q1_U_power_switch_pmos_nmos1.2 ; 2355,2369.25 2367.5,2381.75 ; 2355,2369.25 R11_U_power_switch_pmos_nmos2.1 2370,2360 ; 2355,2369.25 2355,2385 Q1_U_power_switch_pmos_nmos2.2@2367.5,2397.5 ; 2367.5,2381.75 Q1_U_power_switch_pmos_nmos2.2@2367.5,2397.5 ; 2367.5,2381.75 2367.5,2362.5 2370,2360
  Bottom Layer w20: v1(1912.08,2171.1) v1(1941.1,2171.1) 1942.21,2170 v1(2385,2170) ; v1(2385,2345) 2392.51,2337.49 2385,2329.97 v1(2385,2170) ; v1(2413.9,2171.1) 2412.79,2170 v1(2385,2170)
X_0: P1.6 U1.9 | length 813.2
  Top Layer w15: P1.6 1630,3110 1700,3040 1700,2835 1828.98,2706.02 U1.9
X_1: P2.6 U1.7 | length 562.2
  Top Layer w15: P2.6 1758,2857 1857.8,2757.2 U1.7
X_2: P3.6 U1.4 | length 542.7
  Top Layer w15: P3.6 1896.46,3110 1865,3078.54 1865,2879.57 1910.59,2833.98 U1.4
X_3: P4.6 U1.11 | length 641
  Top Layer w15: U1.11 2084.84,2654.84 2100,2670 2100,3018.76 2191.24,3110 P4.6
X_4: P5.6 U1.18 | length 749.4
  Top Layer w15: U1.18@2270,2757.2 U1.18 2182.8,2757.2 2155,2785 2155,2975 2207.22,3027.22 2321.85,3027.22 2404.63,3110 P5.6
X_5: P6.6 U1.20 | length 859.6
  Top Layer w15: U1.20 2210,2808.39 2205,2813.39 2205,2925 2250,2970 2710,2970 2790,3050 P6.6
pads on no net: PIXY.2 PIXY.3 PIXY.5 PIXY.7 PIXY.8 PIXY.9 U1.16 U2.3

## Polygon pours and split planes (outlines as drawn)
GND on Top Layer (solid, remove dead copper, pour order 0): 1380,1970 3005,1970 3005,3725 1380,3725
GND on Bottom Layer (solid, remove dead copper, pour order 2): 1380,1970 3005,1970 3005,3725 1380,3725

## Other copper
Top Layer:
  region: 2260,3305
  region: 1370,2860

## Silkscreen, mask and mechanical layers (free items; w line width, h text height)
Top Overlay:
  text "+5.0V" at 2860,3595 h30
  text "GND" at 2865,3494 h30
  text "SCL" at 2865,3393 h30
  text "SDA" at 2865,3292 h30
  text "IO1" at 2865,3191 h30
  text "X" at 2865,3090 h30
  text "0" at 1480,2975 h60
  text "1" at 1738,2975 h60
  text "2" at 1996,2975 h60
  text "3" at 2254,2975 h60
  text "4" at 2512,2975 h60
  text "5" at 2770,2975 h60
  text "INT" at 1580,2835 h60
  text "GND" at 1580,2733.33 h60
  text "SDA" at 1580,2631.67 h60
  text "SCL" at 1580,2530 h60
  text "GND LED" at 2975,2115 h50 r90
  text "VIN GND" at 1810,2095 h40 r90
  text "GND Px LED" at 1958.86,1995 h30
  text "GND RX TX" at 2280,1995 h30
Mechanical 1:
  the board outline again, w10

## Text inside footprints (layer, text, board x,y; h text height)
C1: Mechanical 17 "d" at 1575,3620 h10 r270; Mechanical 19 "-" at 1575,3620 h10 r270
C2: Mechanical 17 "d" at 1625,3620 h10 r270; Mechanical 19 "-" at 1625,3620 h10 r270
C3: Mechanical 17 "d" at 1675,3620 h10 r270; Mechanical 19 "-" at 1675,3620 h10 r270
C4: Mechanical 17 "d" at 1835,3620 h10 r270; Mechanical 19 "-" at 1835,3620 h10 r270
C5: Mechanical 17 "d" at 1881.61,3620 h10 r270; Mechanical 19 "-" at 1881.61,3620 h10 r270
C6: Mechanical 17 "d" at 1930,3620 h10 r270; Mechanical 19 "-" at 1930,3620 h10 r270
C7: Mechanical 17 "d" at 2140,3620 h10 r270; Mechanical 19 "-" at 2140,3620 h10 r270
C8: Mechanical 17 "d" at 2190,3620 h10 r270; Mechanical 19 "-" at 2190,3620 h10 r270
C9: Mechanical 17 "d" at 2450,3620 h10 r270; Mechanical 19 "-" at 2450,3620 h10 r270
C10: Mechanical 17 "d" at 2705,3620 h10 r270; Mechanical 19 "-" at 2705,3620 h10 r270
C11: Mechanical 17 "d" at 2400,3620 h10 r270; Mechanical 19 "-" at 2400,3620 h10 r270
C12: Mechanical 17 "d" at 2655,3620 h10 r270; Mechanical 19 "-" at 2655,3620 h10 r270
C13: Mechanical 17 "d" at 1978.54,2260 h10; Mechanical 19 "-" at 1978.54,2260 h10
C14: Mechanical 17 "d" at 1978.54,2310 h10; Mechanical 19 "-" at 1978.54,2310 h10
C15: Mechanical 17 "d" at 1978.54,2360 h10; Mechanical 19 "-" at 1978.54,2360 h10
C16: Mechanical 17 "d" at 1871.46,2490 h10 r180; Mechanical 19 "-" at 1871.46,2490 h10 r180
C17: Mechanical 17 "d" at 1871.46,2440 h10 r180; Mechanical 19 "-" at 1871.46,2440 h10 r180
J1: Mechanical 17 "d" at 2775,2455 h40 r270; Mechanical 19 "-" at 2775,2455 h40 r270
J2: Mechanical 17 "d" at 1570,2115 h40 r90; Mechanical 19 "-" at 1570,2115 h40 r90
P1: Mechanical 17 "d" at 1470,3680 h60 r270; Mechanical 19 "-" at 1465,3620 h60 r270
P2: Mechanical 17 "d" at 1728,3680 h60 r270; Mechanical 19 "-" at 1723,3620 h60 r270
P3: Mechanical 17 "d" at 1986,3680 h60 r270; Mechanical 19 "-" at 1981,3620 h60 r270
P4: Mechanical 17 "d" at 2244,3680 h60 r270; Mechanical 19 "-" at 2239,3620 h60 r270
P5: Mechanical 17 "d" at 2502,3680 h60 r270; Mechanical 19 "-" at 2497,3620 h60 r270
P6: Mechanical 17 "d" at 2760,3680 h60 r270; Mechanical 19 "-" at 2755,3620 h60 r270
P7: Mechanical 17 "d" at 1530,2530 h60 r90; Mechanical 19 "-" at 1530,2530 h60 r90
P8: Mechanical 17 "d" at 2565,2120 h60 r180; Mechanical 19 "-" at 2565,2120 h60 r180
P9: Mechanical 17 "d" at 2243.86,2120 h60 r180; Mechanical 19 "-" at 2243.86,2120 h60 r180
PIXY: Mechanical 17 "d" at 2860,2750 h60 r180; Mechanical 19 "-" at 2860,2750 h60 r180; Top Overlay "2" at 2945,2700 h50 r180; Top Overlay "1" at 2935,2800 h50 r180; Top Overlay "9" at 2370,2800 h50 r180; Top Overlay "10" at 2385,2700 h50 r180
Q1_U_power_switch_pmos_nmos1: Mechanical 17 "d" at 2500,2270 h20 r270; Mechanical 19 "-" at 2500,2270 h20 r270
Q1_U_power_switch_pmos_nmos2: Mechanical 17 "d" at 2280,2440 h20; Mechanical 19 "-" at 2280,2440 h20
Q2_U_power_switch_pmos_nmos1: Mechanical 17 "d" at 2300,2270 h20 r270; Mechanical 19 "-" at 2300,2270 h20 r270
Q2_U_power_switch_pmos_nmos2: Mechanical 17 "d" at 2180,2467.5 h20 r270; Mechanical 19 "-" at 2180,2467.5 h20 r270
R1: Mechanical 17 "d" at 1647.33,3310 h10 r90; Mechanical 19 "-" at 1667.33,3310 h10 r90
R2: Mechanical 17 "d" at 1590,3417.54 h10 r270; Mechanical 19 "-" at 1570,3417.54 h10 r270
R3: Mechanical 17 "d" at 1930,2568.86 h10; Mechanical 19 "-" at 1930,2548.86 h10
R4: Mechanical 17 "d" at 1940,2360 h10 r180; Mechanical 19 "-" at 1940,2380 h10 r180
R5: Mechanical 17 "d" at 1880,2320 h10; Mechanical 19 "-" at 1880,2300 h10
R6: Mechanical 17 "d" at 2145,2280 h10 r270; Mechanical 19 "-" at 2125,2280 h10 r270
R7: Mechanical 17 "d" at 2240,2575 h10 r180; Mechanical 19 "-" at 2240,2595 h10 r180
R8: Mechanical 17 "d" at 2085,2425 h10 r90; Mechanical 19 "-" at 2105,2425 h10 r90
R9: Mechanical 17 "d" at 2200,2165 h10 r180; Mechanical 19 "-" at 2200,2185 h10 r180
R11_U_power_switch_pmos_nmos1: Mechanical 17 "d" at 2412.92,2203.87 h5.12 r90; Mechanical 19 "-" at 2413,2204 h5.12 r90
R11_U_power_switch_pmos_nmos2: Mechanical 17 "d" at 2361.13,2362.92 h5.12 r180; Mechanical 19 "-" at 2361,2363 h5.12 r180
R12_U_power_switch_pmos_nmos1: Mechanical 17 "d" at 2187.92,2193.87 h5.12 r90; Mechanical 19 "-" at 2188,2194 h5.12 r90
R12_U_power_switch_pmos_nmos2: Mechanical 17 "d" at 2137.08,2551.13 h5.12 r270; Mechanical 19 "-" at 2137,2551 h5.12 r270
R13_U_power_switch_pmos_nmos1: Mechanical 17 "d" at 2222.92,2193.87 h5.12 r90; Mechanical 19 "-" at 2223,2194 h5.12 r90
R13_U_power_switch_pmos_nmos2: Mechanical 17 "d" at 2178.54,2551.13 h5.12 r270; Mechanical 19 "-" at 2178.46,2551 h5.12 r270
U1: Mechanical 17 "d" at 2120,2880 h50 r270; Mechanical 19 "-" at 2120,2870 h50 r270
U2: Mechanical 17 "d" at 1996.46,2470 h25 r180; Mechanical 19 "-" at 1996.46,2470 h25 r180